# Altium PCB bookmarker.PcbDoc (part 3 of 3)
Units mil, origin at the board's own origin, x right, y up, seen from the top; angles counter-clockwise.
Board outline 5902.76 x 1187.28 mil, 2 copper layers (Top Layer, Bottom Layer); 9 components, 4 nets, 34 pads, 30 vias.
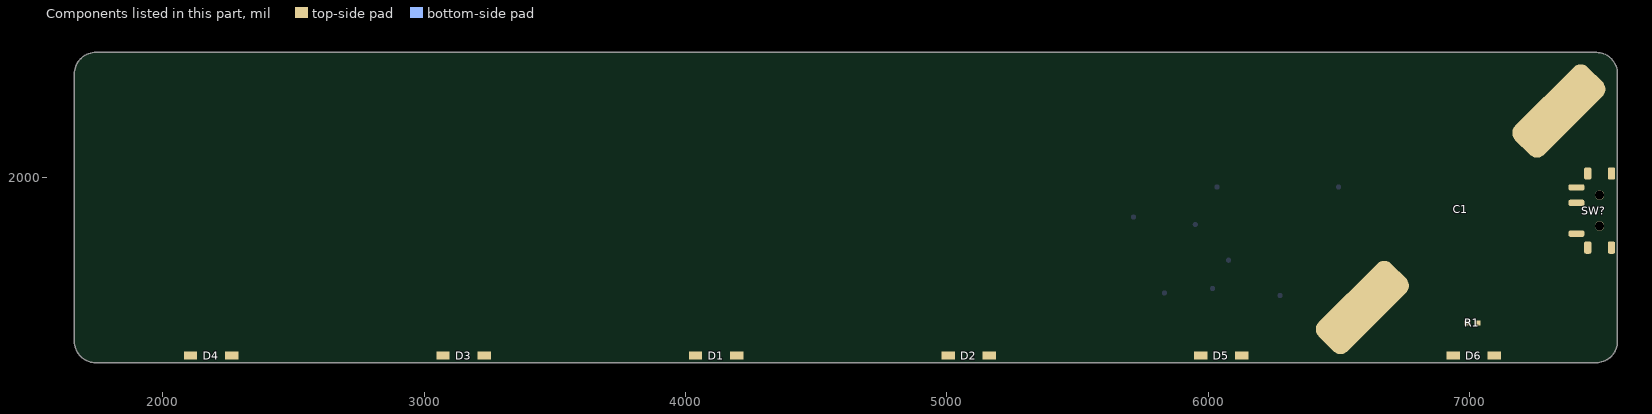
[diagram p3: the components of this part, seen from the top]

## Via types
v1: diameter 24, hole 12, Top Layer to Bottom Layer, tented both sides, 29 vias
v2: diameter 100, hole 80, Top Layer to Bottom Layer, tented both sides, 1 vias

## Nets (pads, with @x,y where several pads share a name; then routed paths per layer and width w, separated by ;. In a path a pad name is that pad's centre, name@x,y a point inside that pad or via, vN(x,y) a via of type N, cw(c..) or ccw(c..) an arc to the next point about the centre after c; other vN are vias at no path point) (continued)
copper on no net: (continued)
  Bottom Layer w5: 4335,1486.5 4348.5,1486.5 ; 4335,2071.5 4357.5,2071.5 ; 4335,2076 4353,2076 ; 4339.5,2062.5 4362,2062.5 ; 4339.5,2067 4362,2067 ; 4344,2058 4366.5,2058 ; 4344,2130 4623,2130 ; 4348.5,2049 4371,2049 ; 4348.5,2053.5 4366.5,2053.5 ; 4353,2044.5 4375.5,2044.5 ; 4357.5,2035.5 4380,2035.5 ; 4357.5,2040 4375.5,2040 ; 4362,2031 4380,2031 ; 4366.5,2022 4384.5,2022 ; 4366.5,2026.5 4384.5,2026.5 ; 4371,2017.5 4384.5,2017.5 ; 4384.5,2283 4407,2283 ; 4384.5,2287.5 4402.5,2287.5 ; 4384.5,2292 4402.5,2292 ; 4384.5,2296.5 4398,2296.5 ; 4389,2274 4411.5,2274 ; 4389,2278.5 4407,2278.5 ; 4393.5,2269.5 4416,2269.5 ; 4398,2260.5 4420.5,2260.5 ; 4398,2265 4416,2265 ; 4402.5,2251.5 4425,2251.5 ; 4402.5,2256 4425,2256 ; 4407,2247 4429.5,2247 ; 4411.5,2238 4434,2238 ; 4411.5,2242.5 4429.5,2242.5 ; 4416,2229 4438.5,2229 ; 4416,2233.5 4438.5,2233.5 ; 4420.5,2224.5 4443,2224.5 ; 4425,2215.5 4447.5,2215.5 ; 4425,2220 4443,2220 ; 4429.5,2211 4452,2211 ; 4434,2202 4456.5,2202 ; 4434,2206.5 4452,2206.5 ; 4438.5,2193 4461,2193 ; 4438.5,2197.5 4461,2197.5 ; 4443,2188.5 4465.5,2188.5 ; 4447.5,2179.5 4470,2179.5 ; 4447.5,2184 4465.5,2184 ; 4452,2170.5 4474.5,2170.5 ; 4452,2175 4474.5,2175 ; 4456.5,2166 4479,2166 ; 4461,2157 4483.5,2157 ; 4461,2161.5 4479,2161.5 ; 4465.5,2148 4488,2148 ; 4465.5,2152.5 4488,2152.5 ; 4470,2143.5 4492.5,2143.5 ; 4474.5,2134.5 4497,2134.5 ; 4474.5,2139 4492.5,2139 ; 4488,2112 4510.5,2112 ; 4492.5,2107.5 4515,2107.5 ; 4497,2098.5 4519.5,2098.5 ; 4497,2103 4515,2103 ; 4501.5,2089.5 4524,2089.5 ; 4501.5,2094 4524,2094 ; 4506,2085 4528.5,2085 ; 4510.5,2076 4533,2076 ; 4510.5,2080.5 4528.5,2080.5 ; 4515,2071.5 4537.5,2071.5 ; 4519.5,2062.5 4542,2062.5 ; 4519.5,2067 4537.5,2067 ; 4524,2053.5 4546.5,2053.5 ; 4524,2058 4546.5,2058 ; 4528.5,2049 4551,2049 ; 4533,2040 4555.5,2040 ; 4533,2044.5 4551,2044.5 ; 4533,2247 4555.5,2247 ; 4533,2251.5 4551,2251.5 ; 4537.5,2031 4560,2031 ; 4537.5,2035.5 4560,2035.5 ; 4537.5,2238 4560,2238 ; 4537.5,2242.5 4555.5,2242.5 ; 4542,2026.5 4564.5,2026.5 ; 4542,2229 4564.5,2229 ; 4542,2233.5 4560,2233.5 ; 4546.5,2017.5 4569,2017.5 ; 4546.5,2022 4564.5,2022 ; 4546.5,2220 4569,2220 ; 4546.5,2224.5 4569,2224.5 ; 4551,2008.5 4573.5,2008.5 ; 4551,2013 4573.5,2013 ; 4551,2215.5 4573.5,2215.5 ; 4551,2265 4654.5,2265 ; 4551,2269.5 4650,2269.5 ; 4551,2274 4650,2274 ; 4555.5,2004 4578,2004 ; 4555.5,2206.5 4578,2206.5 ; 4555.5,2211 4573.5,2211 ; 4555.5,2260.5 4654.5,2260.5 ; 4560,1995 4582.5,1995 ; 4560,1999.5 4578,1999.5 ; 4560,2197.5 4582.5,2197.5 ; 4560,2202 4582.5,2202 ; 4564.5,1990.5 4587,1990.5 ; 4564.5,2193 4587,2193 ; 4569,1981.5 4591.5,1981.5 ; 4569,1986 4587,1986 ; 4569,2184 4591.5,2184 ; 4569,2188.5 4587,2188.5 ; 4573.5,1972.5 4596,1972.5 ; 4573.5,1977 4596,1977 ; 4573.5,2179.5 4596,2179.5 ; 4578,1968 4600.5,1968 ; 4578,2170.5 4600.5,2170.5 ; 4578,2175 4596,2175 ; 4582.5,1959 4605,1959 ; 4582.5,1963.5 4600.5,1963.5 ; 4582.5,2161.5 4605,2161.5 ; 4582.5,2166 4605,2166 ; 4587,1950 4609.5,1950 ; 4587,1954.5 4609.5,1954.5 ; 4587,2157 4609.5,2157 ; 4591.5,1945.5 4614,1945.5 ; 4591.5,2148 4614,2148 ; 4591.5,2152.5 4609.5,2152.5 ; 4596,1936.5 4614,1936.5 ; 4596,1941 4614,1941 ; 4596,2139 4618.5,2139 ; 4596,2143.5 4618.5,2143.5 ; 4600.5,1932 4614,1932 ; 4600.5,2134.5 4623,2134.5 ; 4614,2112 4636.5,2112 ; 4618.5,2103 4641,2103 ; 4618.5,2107.5 4641,2107.5 ; 4623,2098.5 4645.5,2098.5 ; 4627.5,2089.5 4650,2089.5 ; 4627.5,2094 4645.5,2094 ; 4632,2080.5 4654.5,2080.5 ; 4632,2085 4654.5,2085 ; 4636.5,2076 4659,2076 ; 4636.5,2251.5 4663.5,2251.5 ; 4636.5,2256 4659,2256 ; 4641,2067 4663.5,2067 ; 4641,2071.5 4659,2071.5 ; 4641,2247 4663.5,2247 ; 4645.5,2058 4668,2058 ; 4645.5,2062.5 4668,2062.5 ; 4645.5,2238 4668,2238 ; 4645.5,2242.5 4668,2242.5 ; 4650,2053.5 4672.5,2053.5 ; 4650,2229 4677,2229 ; 4650,2233.5 4672.5,2233.5 ; 4654.5,2044.5 4677,2044.5 ; 4654.5,2049 4672.5,2049 ; 4654.5,2224.5 4677,2224.5 ; 4659,2040 4681.5,2040 ; 4659,2215.5 4686,2215.5 ; 4659,2220 4681.5,2220 ; 4663.5,2031 4686,2031 ; 4663.5,2035.5 4681.5,2035.5 ; 4663.5,2211 4686,2211 ; 4668,2022 4690.5,2022 ; 4668,2026.5 4690.5,2026.5 ; 4668,2202 4690.5,2202 ; 4668,2206.5 4690.5,2206.5 ; 4672.5,2017.5 4695,2017.5 ; 4672.5,2193 4699.5,2193 ; 4672.5,2197.5 4695,2197.5 ; 4677,2008.5 4699.5,2008.5 ; 4677,2013 4695,2013 ; 4677,2188.5 4699.5,2188.5 ; 4681.5,1999.5 4704,1999.5 ; 4681.5,2004 4704,2004 ; 4681.5,2179.5 4704,2179.5 ; 4681.5,2184 4704,2184 ; 4686,1995 4708.5,1995 ; 4686,2170.5 4713,2170.5 ; 4686,2175 4708.5,2175 ; 4690.5,1986 4713,1986 ; 4690.5,1990.5 4708.5,1990.5 ; 4690.5,2166 4713,2166 ; 4695,1981.5 4713,1981.5 ; 4695,2157 4722,2157 ; 4695,2161.5 4717.5,2161.5 ; 4699.5,1977 4713,1977 ; 4699.5,2148 4726.5,2148 ; 4699.5,2152.5 4722,2152.5 ; 4704,2143.5 4726.5,2143.5 ; 4708.5,2134.5 4735.5,2134.5 ; 4708.5,2139 4731,2139 ; 4713,2130 4740,2130 ; 4717.5,2121 4785,2121 ; 4717.5,2125.5 4762.5,2125.5 ; 4722,2112 4821,2112 ; 4722,2116.5 4807.5,2116.5 ; 4726.5,2107.5 4825.5,2107.5 ; 4731,2098.5 4753.5,2098.5 ; 4731,2103 4753.5,2103 ; 4735.5,1950 4843.5,1950 ; 4735.5,1954.5 4843.5,1954.5 ; 4735.5,1959 4839,1959 ; 4735.5,1963.5 4839,1963.5 ; 4735.5,2089.5 4762.5,2089.5 ; 4735.5,2094 4758,2094 ; 4740,1945.5 4839,1945.5 ; 4740,2085 4762.5,2085 ; 4744.5,2076 4771.5,2076 ; 4744.5,2080.5 4767,2080.5 ; 4749,2071.5 4771.5,2071.5 ; 4753.5,2062.5 4776,2062.5 ; 4753.5,2067 4776,2067 ; 4758,2053.5 4785,2053.5 ; 4758,2058 4780.5,2058 ; 4762.5,2049 4785,2049 ; 4767,2040 4789.5,2040 ; 4767,2044.5 4789.5,2044.5 ; 4771.5,2031 4798.5,2031 ; 4771.5,2035.5 4794,2035.5 ; 4776,2026.5 4798.5,2026.5 ; 4776,2103 4825.5,2103 ; 4780.5,2017.5 4807.5,2017.5 ; 4780.5,2022 4803,2022 ; 4785,2008.5 4812,2008.5 ; 4785,2013 4807.5,2013 ; 4789.5,2004 4812,2004 ; 4794,1995 4821,1995 ; 4794,1999.5 4816.5,1999.5 ; 4798.5,1990.5 4821,1990.5 ; 4798.5,2098.5 4825.5,2098.5 ; 4803,1981.5 4825.5,1981.5 ; 4803,1986 4825.5,1986 ; 4807.5,1972.5 4834.5,1972.5 ; 4807.5,1977 4830,1977 ; 4812,1968 4834.5,1968
  Bottom Layer w6: 5535.95,1962.65 5545.05,1962.65 ; 5535.95,1967.2 5540.5,1967.2 ; 5535.95,1971.75 5540.5,1971.75 ; 5535.95,1976.3 5540.5,1976.3 ; 5535.95,1980.85 5540.5,1980.85 ; 5535.95,1985.4 5540.5,1985.4 ; 5535.95,1989.95 5545.05,1989.95 ; 5540.5,1953.55 5545.05,1953.55 ; 5540.5,1958.1 5545.05,1958.1 ; 5540.5,1994.5 5549.6,1994.5 ; 5545.05,1944.45 5554.15,1944.45 ; 5545.05,1949 5549.6,1949 ; 5545.05,1999.05 5558.7,1999.05 ; 5545.05,2003.6 5581.45,2003.6 ; 5549.6,1935.35 5558.7,1935.35 ; 5549.6,1939.9 5554.15,1939.9 ; 5549.6,2008.15 5558.7,2008.15 ; 5554.15,1926.25 5563.25,1926.25 ; 5554.15,1930.8 5558.7,1930.8 ; 5554.15,2012.7 5558.7,2012.7 6518.75,2012.7 6532.4,2012.7 ; 5554.15,2017.25 5563.25,2017.25 ; 5558.7,1921.7 5567.8,1921.7 ; 5558.7,2021.8 5563.25,2021.8 ; 5558.7,2026.35 5567.8,2026.35 ; 5563.25,1912.6 5572.35,1912.6 ; 5563.25,1917.15 5567.8,1917.15 ; 5563.25,2030.9 5567.8,2030.9 ; 5567.8,1903.5 5576.9,1903.5 ; 5567.8,1908.05 5572.35,1908.05 ; 5567.8,2008.15 6532.4,2008.15 ; 5567.8,2035.45 5572.35,2035.45 ; 5567.8,2040 5576.9,2040 ; 5572.35,1894.4 5581.45,1894.4 ; 5572.35,1898.95 5576.9,1898.95 ; 5572.35,2044.55 5576.9,2044.55 ; 5572.35,2049.1 5581.45,2049.1 ; 5576.9,1889.85 5581.45,1889.85 ; 5576.9,2053.65 5581.45,2053.65 ; 5576.9,2058.2 5586,2058.2 ; 5581.45,1880.75 5590.55,1880.75 ; 5581.45,1885.3 5586,1885.3 ; 5581.45,2062.75 5586,2062.75 ; 5586,1871.65 5595.1,1871.65 ; 5586,1876.2 5590.55,1876.2 ; 5586,2067.3 5590.55,2067.3 ; 5586,2071.85 5590.55,2071.85 ; 5590.55,1862.55 5599.65,1862.55 ; 5590.55,1867.1 5595.1,1867.1 ; 5590.55,2076.4 5595.1,2076.4 ; 5590.55,2080.95 5599.65,2080.95 ; 5595.1,1858 5599.65,1858 ; 5595.1,2085.5 5599.65,2085.5 ; 5595.1,2090.05 5604.2,2090.05 ; 5599.65,1848.9 5608.75,1848.9 ; 5599.65,1853.45 5604.2,1853.45 ; 5599.65,2094.6 5604.2,2094.6 ; 5599.65,2099.15 5608.75,2099.15 ; 5604.2,1844.35 5608.75,1844.35 ; 5604.2,2103.7 5608.75,2103.7 ; 5604.2,2108.25 5613.3,2108.25 ; 5608.75,1835.25 5617.85,1835.25 ; 5608.75,1839.8 5613.3,1839.8 ; 5608.75,2112.8 5613.3,2112.8 ; 5608.75,2117.35 5617.85,2117.35 ; 5613.3,1830.7 5622.4,1830.7 ; 5613.3,2121.9 5622.4,2121.9 ; 5617.85,1826.15 5626.95,1826.15 ; 5617.85,2126.45 5622.4,2126.45 ; 5617.85,2131 5626.95,2131 ; 5622.4,1821.6 5626.95,1821.6 ; 5622.4,2135.55 5626.95,2135.55 ; 5622.4,2140.1 5631.5,2140.1 ; 5626.95,1817.05 5636.05,1817.05 ; 5626.95,2144.65 5631.5,2144.65 ; 5626.95,2149.2 5636.05,2149.2 ; 5631.5,1812.5 5640.6,1812.5 ; 5631.5,2153.75 5636.05,2153.75 ; 5636.05,1807.95 5645.15,1807.95 ; 5636.05,2158.3 5640.6,2158.3 ; 5636.05,2162.85 5640.6,2162.85 ; 5640.6,1803.4 5654.25,1803.4 ; 5640.6,2167.4 5645.15,2167.4 ; 5640.6,2171.95 5649.7,2171.95 ; 5645.15,2176.5 5649.7,2176.5 ; 5645.15,2181.05 5654.25,2181.05 ; 5649.7,1798.85 5663.35,1798.85 ; 5649.7,2185.6 5654.25,2185.6 ; 5649.7,2190.15 5658.8,2190.15 ; 5654.25,2194.7 5658.8,2194.7 ; 5658.8,1794.3 5677,1794.3 ; 5658.8,2199.25 5663.35,2199.25 ; 5658.8,2203.8 5667.9,2203.8 ; 5663.35,2208.35 5667.9,2208.35 ; 5663.35,2212.9 5672.45,2212.9 ; 5667.9,2217.45 5677,2217.45 ; 5672.45,1789.75 5699.75,1789.75 ; 5672.45,2222 5677,2222 ; 5677,2226.55 5681.55,2226.55 ; 5677,2231.1 5686.1,2231.1 ; 5681.55,2235.65 5690.65,2235.65 ; 5686.1,2240.2 5695.2,2240.2 ; 5690.65,1785.2 6091.05,1785.2 ; 5690.65,2244.75 5695.2,2244.75 ; 5695.2,1694.2 5704.3,1694.2 ; 5695.2,1698.75 5699.75,1698.75 ; 5695.2,1703.3 5699.75,1703.3 ; 5695.2,1707.85 5699.75,1707.85 ; 5695.2,1712.4 5699.75,1712.4 ; 5695.2,1716.95 5704.3,1716.95 ; 5695.2,2249.3 5704.3,2249.3 ; 5699.75,1680.55 5708.85,1680.55 ; 5699.75,1685.1 5704.3,1685.1 ; 5699.75,1689.65 5704.3,1689.65 ; 5699.75,1721.5 5708.85,1721.5 ; 5699.75,1726.05 5717.95,1726.05 ; 5699.75,2253.85 5708.85,2253.85 ; 5704.3,1671.45 5713.4,1671.45 ; 5704.3,1676 5708.85,1676 ; 5704.3,1730.6 6122.9,1730.6 ; 5704.3,2258.4 5717.95,2258.4 ; 5708.85,1662.35 5717.95,1662.35 ; 5708.85,1666.9 5713.4,1666.9 ; 5708.85,1735.15 6122.9,1735.15 ; 5708.85,1739.7 5717.95,1739.7 ; 5713.4,1653.25 5722.5,1653.25 ; 5713.4,1657.8 5717.95,1657.8 ; 5713.4,1744.25 5717.95,1744.25 ; 5713.4,1748.8 5722.5,1748.8 ; 5713.4,2262.95 5731.6,2262.95 ; 5717.95,1644.15 5727.05,1644.15 ; 5717.95,1648.7 5722.5,1648.7 ; 5717.95,1753.35 5727.05,1753.35 ; 5722.5,1639.6 5727.05,1639.6 ; 5722.5,1757.9 5727.05,1757.9 ; 5722.5,1762.45 5731.6,1762.45 ; 5727.05,1630.5 5736.15,1630.5 ; 5727.05,1635.05 5731.6,1635.05 ; 5727.05,1767 5731.6,1767 ; 5727.05,1771.55 5736.15,1771.55 ; 5727.05,1780.65 6095.6,1780.65 ; 5727.05,2267.5 5909.05,2267.5 ; 5731.6,1621.4 5740.7,1621.4 ; 5731.6,1625.95 5736.15,1625.95 ; 5731.6,1776.1 5736.15,1776.1 ; 5736.15,1612.3 5745.25,1612.3 ; 5736.15,1616.85 5740.7,1616.85 ; 5740.7,1603.2 5749.8,1603.2 ; 5740.7,1607.75 5745.25,1607.75 ; 5745.25,1598.65 5749.8,1598.65 ; 5749.8,1589.55 5758.9,1589.55 ; 5749.8,1594.1 5754.35,1594.1 ; 5754.35,1580.45 5763.45,1580.45 ; 5754.35,1585 5758.9,1585 ; 5758.9,1575.9 5763.45,1575.9 ; 5763.45,1566.8 5772.55,1566.8 ; 5763.45,1571.35 5768,1571.35 ; 5768,1557.7 5777.1,1557.7 ; 5768,1562.25 5772.55,1562.25 ; 5772.55,1553.15 5781.65,1553.15 ; 5777.1,1548.6 5786.2,1548.6 ; 5781.65,1544.05 5790.75,1544.05 ; 5786.2,1539.5 5795.3,1539.5 ; 5790.75,1534.95 5799.85,1534.95 ; 5795.3,1530.4 5808.95,1530.4 ; 5804.4,1525.85 5818.05,1525.85 ; 5813.5,1521.3 5836.25,1521.3 ; 5831.7,1516.75 6191.15,1516.75 6773.25,1516.75 6814.5,1516.75 ; 5840.8,2126.45 5849.9,2126.45 ; 5840.8,2131 5849.9,2131 ; 5840.8,2135.55 5845.35,2135.55 ; 5840.8,2140.1 5845.35,2140.1 ; 5840.8,2144.65 5845.35,2144.65 ; 5840.8,2149.2 5845.35,2149.2 ; 5840.8,2153.75 5849.9,2153.75 ; 5840.8,2158.3 5849.9,2158.3 ; 5845.35,2112.8 5854.45,2112.8 ; 5845.35,2117.35 5849.9,2117.35 ; 5845.35,2121.9 5849.9,2121.9 ; 5845.35,2162.85 5849.9,2162.85 ; 5845.35,2167.4 5849.9,2167.4 ; 5845.35,2171.95 5854.45,2171.95 ; 5849.9,2099.15 5859,2099.15 ; 5849.9,2103.7 5854.45,2103.7 ; 5849.9,2108.25 5854.45,2108.25 ; 5849.9,2176.5 5854.45,2176.5 ; 5849.9,2181.05 5859,2181.05 ; 5854.45,1512.2 6809.95,1512.2 6819.05,1512.2 ; 5854.45,2090.05 5863.55,2090.05 ; 5854.45,2094.6 5859,2094.6 ; 5854.45,2185.6 5863.55,2185.6 ; 5859,2080.95 5868.1,2080.95 ; 5859,2085.5 5863.55,2085.5 ; 5859,2190.15 5868.1,2190.15 ; 5859,2194.7 5877.2,2194.7 ; 5863.55,2071.85 5872.65,2071.85 ; 5863.55,2076.4 5868.1,2076.4 ; 5863.55,2199.25 5881.75,2199.25 ; 5863.55,2203.8 5872.65,2203.8 ; 5868.1,2067.3 5872.65,2067.3 ; 5868.1,2208.35 5872.65,2208.35 ; 5872.65,2058.2 5881.75,2058.2 ; 5872.65,2062.75 5877.2,2062.75 ; 5872.65,2212.9 5877.2,2212.9 ; 5872.65,2217.45 5881.75,2217.45 ; 5877.2,2049.1 5886.3,2049.1 ; 5877.2,2053.65 5881.75,2053.65 ; 5877.2,2203.8 5895.4,2203.8 ; 5877.2,2222 5881.75,2222 ; 5877.2,2226.55 5886.3,2226.55 ; 5881.75,2044.55 5886.3,2044.55 ; 5881.75,2231.1 5886.3,2231.1 ; 5881.75,2235.65 5890.85,2235.65 ; 5886.3,2035.45 5895.4,2035.45 ; 5886.3,2040 5890.85,2040 ; 5886.3,2208.35 5909.05,2208.35 ; 5886.3,2240.2 5890.85,2240.2 ; 5886.3,2244.75 5895.4,2244.75 ; 5890.85,2026.35 5899.95,2026.35 ; 5890.85,2030.9 5895.4,2030.9 ; 5890.85,2249.3 5895.4,2249.3 ; 5895.4,2017.25 5904.5,2017.25 ; 5895.4,2021.8 5899.95,2021.8 ; 5895.4,2253.85 5899.95,2253.85 ; 5895.4,2258.4 5904.5,2258.4 ; 5895.4,2262.95 5904.5,2262.95 ; 5899.95,2012.7 5909.05,2012.7 ; 5899.95,2212.9 5963.65,2212.9 ; 5904.5,2272.05 5909.05,2272.05 ; 5904.5,2276.6 5913.6,2276.6 ; 5909.05,2281.15 5913.6,2281.15 ; 5913.6,2285.7 5918.15,2285.7 ; 5913.6,2290.25 5922.7,2290.25 ; 5918.15,2294.8 5922.7,2294.8 ; 5918.15,2299.35 5927.25,2299.35 ; 5920,2217.45 6204.8,2217.45 ; 5922.7,2303.9 5927.25,2303.9 ; 5922.7,2308.45 5931.8,2308.45 ; 5927.25,2313 5931.8,2313 ; 5927.25,2317.55 5936.35,2317.55 ; 5931.8,2322.1 5936.35,2322.1 ; 5931.8,2326.65 5940.9,2326.65 ; 5936.35,2331.2 5940.9,2331.2 ; 5940.9,2335.75 5945.45,2335.75 ; 5940.9,2340.3 5950,2340.3 ; 5945.45,2344.85 5950,2344.85 ; 5945.45,2349.4 5954.55,2349.4 ; 5950,2353.95 5954.55,2353.95 ; 5950,2358.5 5959.1,2358.5 ; 5954.55,2363.05 5959.1,2363.05 ; 5954.55,2367.6 5963.65,2367.6 ; 5955,2212.9 6223,2212.9 ; 5959.1,2003.6 5968.2,2003.6 ; 5959.1,2372.15 5968.2,2372.15 ; 5963.65,1994.5 5972.75,1994.5 ; 5963.65,1999.05 5968.2,1999.05 ; 5963.65,2376.7 5968.2,2376.7 ; 5963.65,2381.25 5972.75,2381.25 ; 5968.2,1985.4 5977.3,1985.4 ; 5968.2,1989.95 5972.75,1989.95 ; 5968.2,2385.8 5972.75,2385.8 ; 5968.2,2390.35 5977.3,2390.35 ; 5972.75,1980.85 5981.85,1980.85 ; 5972.75,2394.9 5981.85,2394.9 ; 5977.3,1971.75 5986.4,1971.75 ; 5977.3,1976.3 5981.85,1976.3 ; 5977.3,2399.45 5981.85,2399.45 ; 5977.3,2404 5986.4,2404 ; 5981.85,1962.65 5990.95,1962.65 ; 5981.85,1967.2 5986.4,1967.2 ; 5981.85,2408.55 5986.4,2408.55 ; 5986.4,1953.55 5995.5,1953.55 ; 5986.4,1958.1 5990.95,1958.1 ; 5986.4,2413.1 5990.95,2413.1 ; 5986.4,2417.65 5995.5,2417.65 ; 5990.95,1949 6000.05,1949 ; 5990.95,2422.2 6000.05,2422.2 ; 5995.5,1939.9 6004.6,1939.9 ; 5995.5,1944.45 6000.05,1944.45 ; 5995.5,2426.75 6000.05,2426.75 ; 5995.5,2431.3 6004.6,2431.3 ; 6000.05,1930.8 6009.15,1930.8 ; 6000.05,1935.35 6004.6,1935.35 ; 6000.05,2435.85 6009.15,2435.85 ; 6004.6,1921.7 6013.7,1921.7 ; 6004.6,1926.25 6009.15,1926.25 ; 6004.6,2440.4 6013.7,2440.4 ; 6009.15,1917.15 6018.25,1917.15 ; 6009.15,2444.95 6018.25,2444.95 ; 6013.7,1908.05 6022.8,1908.05 ; 6013.7,1912.6 6018.25,1912.6 ; 6013.7,2449.5 6022.8,2449.5 ; 6018.25,1898.95 6027.35,1898.95 ; 6018.25,1903.5 6022.8,1903.5 ; 6022.8,1894.4 6031.9,1894.4 ; 6022.8,2454.05 6031.9,2454.05 ; 6027.35,1885.3 6036.45,1885.3 ; 6027.35,1889.85 6031.9,1889.85 ; 6027.35,2458.6 6036.45,2458.6 6041,2463.15 6050.1,2463.15 6391.35,2463.15 6414.1,2463.15 ; 6031.9,1876.2 6041,1876.2 ; 6031.9,1880.75 6036.45,1880.75 ; 6036.45,1867.1 6045.55,1867.1 ; 6036.45,1871.65 6041,1871.65 ; 6041,1862.55 6045.55,1862.55 ; 6045.55,1853.45 6054.65,1853.45 ; 6045.55,1858 6050.1,1858 ; 6050.1,1844.35 6059.2,1844.35 ; 6050.1,1848.9 6054.65,1848.9 ; 6052.95,2467.25 6093.9,2467.25 ; 6054.65,1835.25 6063.75,1835.25 ; 6054.65,1839.8 6059.2,1839.8 ; 6059.2,1830.7 6063.75,1830.7 ; 6063.75,1821.6 6072.85,1821.6 ; 6063.75,1826.15 6068.3,1826.15 ; 6068.3,1812.5 6077.4,1812.5 ; 6068.3,1817.05 6072.85,1817.05 ; 6072.85,1807.95 6077.4,1807.95 ; 6077.4,1798.85 6086.5,1798.85 ; 6077.4,1803.4 6081.95,1803.4 ; 6081.4,2466.8 6245.2,2466.8 ; 6081.95,1789.75 6091.05,1789.75 ; 6081.95,1794.3 6086.5,1794.3 ; 6091.05,1771.55 6100.15,1771.55 ; 6091.05,1776.1 6095.6,1776.1 ; 6095.6,1767 6104.7,1767 ; 6100.15,1757.9 6109.25,1757.9 ; 6100.15,1762.45 6104.7,1762.45 ; 6104.7,1748.8 6113.8,1748.8 ; 6104.7,1753.35 6109.25,1753.35 ; 6109.25,1739.7 6118.35,1739.7 ; 6109.25,1744.25 6113.8,1744.25 ; 6118.35,1726.05 6127.45,1726.05 ; 6122.9,1716.95 6132,1716.95 ; 6122.9,1721.5 6127.45,1721.5 ; 6127.45,1712.4 6136.55,1712.4 ; 6132,1703.3 6141.1,1703.3 ; 6132,1707.85 6136.55,1707.85 ; 6136.55,1694.2 6145.65,1694.2 ; 6136.55,1698.75 6141.1,1698.75 ; 6141.1,1685.1 6150.2,1685.1 ; 6141.1,1689.65 6145.65,1689.65 ; 6145.65,1680.55 6150.2,1680.55 ; 6150.2,1671.45 6159.3,1671.45 ; 6150.2,1676 6154.75,1676 ; 6154.75,1662.35 6163.85,1662.35 ; 6154.75,1666.9 6159.3,1666.9 ; 6159.3,1653.25 6168.4,1653.25 ; 6159.3,1657.8 6163.85,1657.8 ; 6163.85,1648.7 6172.95,1648.7 ; 6168.4,1639.6 6177.5,1639.6 ; 6168.4,1644.15 6172.95,1644.15 ; 6172.95,1630.5 6182.05,1630.5 ; 6172.95,1635.05 6177.5,1635.05 ; 6177.5,1625.95 6186.6,1625.95 ; 6182.05,1616.85 6191.15,1616.85 ; 6182.05,1621.4 6186.6,1621.4 ; 6186.6,1607.75 6195.7,1607.75 ; 6186.6,1612.3 6191.15,1612.3 ; 6191.15,1507.65 6200.25,1507.65 ; 6191.15,1598.65 6200.25,1598.65 ; 6191.15,1603.2 6195.7,1603.2 ; 6192.85,2467.25 6374.85,2467.25 ; 6195.7,1498.55 6204.8,1498.55 ; 6195.7,1503.1 6200.25,1503.1 ; 6195.7,1594.1 6200.25,1594.1 ; 6200.25,1489.45 6209.35,1489.45 ; 6200.25,1494 6204.8,1494 ; 6200.25,1585 6209.35,1585 ; 6200.25,1589.55 6204.8,1589.55 ; 6204.8,1480.35 6213.9,1480.35 ; 6204.8,1484.9 6209.35,1484.9 ; 6204.8,1575.9 6213.9,1575.9 ; 6204.8,1580.45 6209.35,1580.45 ; 6209.35,1475.8 6213.9,1475.8 ; 6209.35,1566.8 6218.45,1566.8 ; 6209.35,1571.35 6213.9,1571.35 ; 6213.9,1466.7 6223,1466.7 ; 6213.9,1471.25 6218.45,1471.25 ; 6213.9,1562.25 6223,1562.25 ; 6218.45,1462.15 6223,1462.15 ; 6218.45,1553.15 6227.55,1553.15 ; 6218.45,1557.7 6223,1557.7 ; 6218.45,2208.35 6245.75,2208.35 ; 6223,1453.05 6232.1,1453.05 ; 6223,1457.6 6227.55,1457.6 ; 6223,1544.05 6232.1,1544.05 ; 6223,1548.6 6227.55,1548.6 ; 6227.55,1443.95 6236.65,1443.95 ; 6227.55,1448.5 6232.1,1448.5 ; 6227.55,1539.5 6236.65,1539.5 ; 6232.1,1439.4 6241.2,1439.4 ; 6232.1,1530.4 6241.2,1530.4 ; 6232.1,1534.95 6236.65,1534.95 ; 6232.1,1844.35 6241.2,1844.35 6236.65,1848.9 6232.1,1848.9 ; 6232.1,1853.45 6236.65,1853.45 ; 6232.1,1858 6241.2,1858 ; 6236.65,1430.3 6245.75,1430.3 ; 6236.65,1434.85 6241.2,1434.85 ; 6236.65,1521.3 6245.75,1521.3 ; 6236.65,1525.85 6241.2,1525.85 ; 6236.65,1830.7 6245.75,1830.7 6241.2,1835.25 6236.65,1835.25 ; 6236.65,1839.8 6241.2,1839.8 ; 6236.65,1862.55 6241.2,1862.55 ; 6236.65,1867.1 6245.75,1867.1 ; 6241.2,1425.75 6250.3,1425.75 ; 6241.2,1821.6 6250.3,1821.6 ; 6241.2,1826.15 6245.75,1826.15 ; 6241.2,1871.65 6441.4,1871.65 6459.6,1871.65 ; 6241.2,2203.8 6263.95,2203.8 ; 6245.75,1421.2 6254.85,1421.2 ; 6245.75,1812.5 6254.85,1812.5 ; 6245.75,1817.05 6250.3,1817.05 ; 6250.3,1412.1 6259.4,1412.1 ; 6250.3,1416.65 6254.85,1416.65 ; 6250.3,1803.4 6259.4,1803.4 ; 6250.3,1807.95 6254.85,1807.95 ; 6254.85,1407.55 6263.95,1407.55 ; 6254.85,1794.3 6263.95,1794.3 ; 6254.85,1798.85 6259.4,1798.85 ; 6254.85,1876.2 6445.95,1876.2 ; 6259.4,1403 6268.5,1403 ; 6259.4,1785.2 6268.5,1785.2 ; 6259.4,1789.75 6263.95,1789.75 ; 6259.4,2199.25 6277.6,2199.25 ; 6263.95,1398.45 6273.05,1398.45 ; 6263.95,1780.65 6273.05,1780.65 ; 6268.5,1393.9 6277.6,1393.9 ; 6268.5,1771.55 6277.6,1771.55 ; 6268.5,1776.1 6273.05,1776.1 ; 6273.05,1389.35 6282.15,1389.35 ; 6273.05,1762.45 6282.15,1762.45 ; 6273.05,1767 6277.6,1767 ; 6273.05,2194.7 6291.25,2194.7 ; 6277.6,1384.8 6286.7,1384.8 ; 6277.6,1757.9 6286.7,1757.9 ; 6282.15,1380.25 6291.25,1380.25 ; 6282.15,1748.8 6291.25,1748.8 ; 6282.15,1753.35 6286.7,1753.35 ; 6286.7,1375.7 6295.8,1375.7 ; 6286.7,1739.7 6295.8,1739.7 ; 6286.7,1744.25 6291.25,1744.25 ; 6286.7,2190.15 6304.9,2190.15 ; 6291.25,1371.15 6300.35,1371.15 ; 6291.25,1735.15 6295.8,1735.15 ; 6295.8,1366.6 6304.9,1366.6 ; 6295.8,1726.05 6304.9,1726.05 ; 6295.8,1730.6 6300.35,1730.6 ; 6300.35,1362.05 6309.45,1362.05 ; 6300.35,1716.95 6309.45,1716.95 ; 6300.35,1721.5 6304.9,1721.5 ; 6300.35,2185.6 6314,2185.6 ; 6304.9,1707.85 6314,1707.85 ; 6304.9,1712.4 6309.45,1712.4 ; 6309.45,1357.5 6318.55,1357.5 ; 6309.45,1703.3 6318.55,1703.3 ; 6309.45,2181.05 6327.65,2181.05 ; 6314,1352.95 6323.1,1352.95 ; 6314,1694.2 6323.1,1694.2 ; 6314,1698.75 6318.55,1698.75 ; 6318.55,1689.65 6323.1,1689.65 ; 6323.1,1680.55 6332.2,1680.55 ; 6323.1,1685.1 6327.65,1685.1 ; 6323.1,2176.5 6336.75,2176.5 ; 6327.65,1676 6336.75,1676 ; 6332.2,1671.45 6341.3,1671.45 ; 6332.2,2171.95 6345.85,2171.95 ; 6341.3,1666.9 6350.4,1666.9 ; 6341.3,2167.4 6354.95,2167.4 ; 6345.85,1662.35 6354.95,1662.35 ; 6350.4,2162.85 6364.05,2162.85 ; 6354.95,1657.8 6368.6,1657.8 ; 6359.5,2158.3 6373.15,2158.3 ; 6364.05,1653.25 6382.25,1653.25 ; 6364.05,2467.7 6395.9,2467.7 ; 6368.6,2153.75 6382.25,2153.75 ; 6373.15,1648.7 6577.9,1648.7 ; 6377.7,2149.2 6386.8,2149.2 ; 6382.25,2144.65 6395.9,2144.65 ; 6391.35,1644.15 6564.25,1644.15 ; 6391.35,2140.1 6400.45,2140.1 ; 6395.9,2135.55 6409.55,2135.55 ; 6405,2131 6414.1,2131 ; 6409.55,2126.45 6423.2,2126.45 ; 6409.55,2458.6 6432.3,2458.6 ; 6418.65,2121.9 6427.75,2121.9 ; 6423.2,2117.35 6432.3,2117.35 ; 6427.75,2112.8 6436.85,2112.8 ; 6427.75,2454.05 6445.95,2454.05 ; 6436.85,2108.25 6445.95,2108.25 ; 6441.4,2103.7 6450.5,2103.7 ; 6441.4,2449.5 6455.05,2449.5 ; 6445.95,2099.15 6455.05,2099.15 ; 6450.5,2094.6 6459.6,2094.6 ; 6450.5,2444.95 6468.7,2444.95 ; 6455.05,1867.1 6468.7,1867.1 ; 6455.05,2090.05 6464.15,2090.05 ; 6459.6,2085.5 6468.7,2085.5 ; 6464.15,1862.55 6477.8,1862.55 ; 6464.15,2080.95 6473.25,2080.95 ; 6464.15,2440.4 6477.8,2440.4 ; 6468.7,2076.4 6477.8,2076.4 ; 6473.25,1858 6482.35,1858 ; 6473.25,2071.85 6482.35,2071.85 ; 6473.25,2435.85 6486.9,2435.85 ; 6477.8,2067.3 6486.9,2067.3 ; 6482.35,1853.45 6491.45,1853.45 ; 6482.35,2062.75 6491.45,2062.75 ; 6482.35,2431.3 6496,2431.3 ; 6486.9,1848.9 6496,1848.9 ; 6486.9,2058.2 6496,2058.2 ; 6491.45,1844.35 6500.55,1844.35 ; 6491.45,2053.65 6500.55,2053.65 ; 6491.45,2426.75 6505.1,2426.75 ; 6496,1839.8 6500.55,1839.8 ; 6496,2049.1 6500.55,2049.1 ; 6500.55,1830.7 6509.65,1830.7 ; 6500.55,1835.25 6505.1,1835.25 ; 6500.55,2040 6509.65,2040 ; 6500.55,2044.55 6505.1,2044.55 ; 6500.55,2422.2 6514.2,2422.2 ; 6505.1,1826.15 6509.65,1826.15 ; 6505.1,2035.45 6514.2,2035.45 ; 6509.65,1817.05 6518.75,1817.05 ; 6509.65,1821.6 6514.2,1821.6 ; 6509.65,2026.35 6518.75,2026.35 ; 6509.65,2030.9 6514.2,2030.9 ; 6509.65,2417.65 6523.3,2417.65 ; 6514.2,1807.95 6523.3,1807.95 ; 6514.2,1812.5 6518.75,1812.5 ; 6514.2,2021.8 6523.3,2021.8 ; 6518.75,1803.4 6527.85,1803.4 ; 6518.75,2017.25 6536.95,2017.25 ; 6518.75,2413.1 6532.4,2413.1 ; 6523.3,1794.3 6532.4,1794.3 ; 6523.3,1798.85 6527.85,1798.85 ; 6527.85,1785.2 6536.95,1785.2 ; 6527.85,1789.75 6532.4,1789.75 ; 6527.85,1999.05 6536.95,1999.05 ; 6527.85,2003.6 6532.4,2003.6 ; 6527.85,2408.55 6536.95,2408.55 ; 6532.4,1780.65 6541.5,1780.65 ; 6532.4,1994.5 6536.95,1994.5 ; 6532.4,2021.8 6536.95,2021.8 ; 6532.4,2026.35 6541.5,2026.35 ; 6536.95,1771.55 6546.05,1771.55 ; 6536.95,1776.1 6541.5,1776.1 ; 6536.95,1985.4 6541.5,1985.4 ; 6536.95,1989.95 6541.5,1989.95 ; 6536.95,2030.9 6541.5,2030.9 ; 6536.95,2035.45 6546.05,2035.45 ; 6536.95,2404 6546.05,2404 ; 6541.5,1762.45 6550.6,1762.45 ; 6541.5,1767 6546.05,1767 ; 6541.5,1976.3 6550.6,1976.3 ; 6541.5,1980.85 6546.05,1980.85 ; 6541.5,2040 6550.6,2040 ; 6541.5,2399.45 6550.6,2399.45 ; 6546.05,1757.9 6550.6,1757.9 ; 6546.05,1967.2 6555.15,1967.2 ; 6546.05,1971.75 6550.6,1971.75 ; 6546.05,2044.55 6550.6,2044.55 ; 6546.05,2049.1 6555.15,2049.1 ; 6550.6,1748.8 6559.7,1748.8 ; 6550.6,1753.35 6555.15,1753.35 ; 6550.6,1958.1 6559.7,1958.1 ; 6550.6,1962.65 6555.15,1962.65 ; 6550.6,2053.65 6555.15,2053.65 ; 6550.6,2058.2 6559.7,2058.2 ; 6550.6,2394.9 6559.7,2394.9 ; 6555.15,1739.7 6564.25,1739.7 ; 6555.15,1744.25 6559.7,1744.25 ; 6555.15,1953.55 6559.7,1953.55 ; 6555.15,2062.75 6559.7,2062.75 ; 6555.15,2067.3 6564.25,2067.3 ; 6555.15,2390.35 6564.25,2390.35 ; 6559.7,1730.6 6568.8,1730.6 ; 6559.7,1735.15 6564.25,1735.15 ; 6559.7,1944.45 6568.8,1944.45 ; 6559.7,1949 6564.25,1949 ; 6559.7,2071.85 6568.8,2071.85 ; 6559.7,2385.8 6573.35,2385.8 ; 6564.25,1726.05 6573.35,1726.05 ; 6564.25,1935.35 6573.35,1935.35 ; 6564.25,1939.9 6568.8,1939.9 ; 6564.25,2076.4 6568.8,2076.4 ; 6564.25,2080.95 6573.35,2080.95 ; 6568.8,1716.95 6577.9,1716.95 ; 6568.8,1721.5 6573.35,1721.5 ; 6568.8,1926.25 6577.9,1926.25 ; 6568.8,1930.8 6573.35,1930.8 ; 6568.8,2085.5 6573.35,2085.5 ; 6568.8,2090.05 6577.9,2090.05 ; 6568.8,2381.25 6577.9,2381.25 ; 6573.35,1653.25 6587,1653.25 ; 6573.35,1707.85 6582.45,1707.85 ; 6573.35,1712.4 6577.9,1712.4 ; 6573.35,1921.7 6582.45,1921.7 ; 6573.35,2094.6 6582.45,2094.6 ; 6573.35,2376.7 6678,2376.7 ; 6577.9,1698.75 6587,1698.75 ; 6577.9,1703.3 6582.45,1703.3 ; 6577.9,1912.6 6587,1912.6 ; 6577.9,1917.15 6582.45,1917.15 ; 6577.9,2099.15 6582.45,2099.15 ; 6577.9,2103.7 6587,2103.7 ; 6582.45,1657.8 6587,1657.8 ; 6582.45,1685.1 6591.55,1685.1 ; 6582.45,1689.65 6587,1689.65 ; 6582.45,1694.2 6587,1694.2 ; 6582.45,1903.5 6591.55,1903.5 ; 6582.45,1908.05 6587,1908.05 ; 6582.45,2108.25 6587,2108.25 ; 6582.45,2112.8 6591.55,2112.8 ; 6582.45,2372.15 6591.55,2372.15 ; 6587,1662.35 6591.55,1662.35 ; 6587,1666.9 6591.55,1666.9 ; 6587,1671.45 6591.55,1671.45 ; 6587,1676 6591.55,1676 ; 6587,1680.55 6591.55,1680.55 ; 6587,1898.95 6591.55,1898.95 ; 6587,2117.35 6591.55,2117.35 ; 6587,2121.9 6596.1,2121.9 ; 6587,2367.6 6596.1,2367.6 ; 6591.55,1889.85 6600.65,1889.85 ; 6591.55,1894.4 6596.1,1894.4 ; 6591.55,2126.45 6600.65,2126.45 ; 6591.55,2363.05 6600.65,2363.05 ; 6596.1,1880.75 6605.2,1880.75 ; 6596.1,1885.3 6600.65,1885.3 ; 6596.1,2131 6600.65,2131 ; 6596.1,2135.55 6605.2,2135.55 ; 6596.1,2358.5 6605.2,2358.5 ; 6600.65,1871.65 6609.75,1871.65 ; 6600.65,1876.2 6605.2,1876.2 ; 6600.65,2140.1 6605.2,2140.1 ; 6600.65,2144.65 6609.75,2144.65 ; 6600.65,2353.95 6609.75,2353.95 ; 6605.2,1862.55 6614.3,1862.55 ; 6605.2,1867.1 6609.75,1867.1 ; 6605.2,2149.2 6609.75,2149.2 ; 6605.2,2153.75 6614.3,2153.75 ; 6605.2,2349.4 6614.3,2349.4 ; 6609.75,1858 6618.85,1858 ; 6609.75,2158.3 6618.85,2158.3 ; 6609.75,2344.85 6618.85,2344.85 ; 6614.3,1848.9 6623.4,1848.9 ; 6614.3,1853.45 6618.85,1853.45 ; 6614.3,2162.85 6618.85,2162.85 ; 6614.3,2167.4 6623.4,2167.4 ; 6618.85,1839.8 6627.95,1839.8 ; 6618.85,1844.35 6623.4,1844.35 ; 6618.85,2171.95 6623.4,2171.95 ; 6618.85,2176.5 6627.95,2176.5 ; 6618.85,2335.75 6627.95,2335.75 ; 6618.85,2340.3 6623.4,2340.3 ; 6623.4,1835.25 6632.5,1835.25 ; 6623.4,2181.05 6632.5,2181.05 ; 6627.95,1826.15 6641.6,1826.15 ; 6627.95,1830.7 6632.5,1830.7 ; 6627.95,2185.6 6632.5,2185.6 ; 6627.95,2190.15 6637.05,2190.15 ; 6627.95,2326.65 6637.05,2326.65 ; 6627.95,2331.2 6632.5,2331.2 ; 6632.5,1817.05 6646.15,1817.05 ; 6632.5,1821.6 6646.15,1821.6 ; 6632.5,2194.7 6637.05,2194.7 ; 6632.5,2199.25 6641.6,2199.25 ; 6632.5,2322.1 6641.6,2322.1 ; 6637.05,1807.95 6646.15,1807.95 ; 6637.05,1812.5 6646.15,1812.5 ; 6637.05,1830.7 6641.6,1830.7 ; 6637.05,1835.25 6641.6,1835.25 ; 6637.05,1839.8 6641.6,1839.8 ; 6637.05,1844.35 6641.6,1844.35 ; 6637.05,1848.9 6641.6,1848.9 ; 6637.05,1853.45 6641.6,1853.45 ; 6637.05,1858 6641.6,1858 ; 6637.05,1862.55 6641.6,1862.55 ; 6637.05,1867.1 6641.6,1867.1 ; 6637.05,1871.65 6641.6,1871.65 ; 6637.05,1876.2 6641.6,1876.2 ; 6637.05,1880.75 6641.6,1880.75 ; 6637.05,1885.3 6641.6,1885.3 ; 6637.05,1889.85 6641.6,1889.85 ; 6637.05,1894.4 6641.6,1894.4 ; 6637.05,1898.95 6641.6,1898.95 ; 6637.05,1903.5 6641.6,1903.5 ; 6637.05,1908.05 6641.6,1908.05 ; 6637.05,1912.6 6641.6,1912.6 ; 6637.05,1917.15 6641.6,1917.15 ; 6637.05,1921.7 6646.15,1921.7 ; 6637.05,1926.25 6646.15,1926.25 ; 6637.05,2203.8 6641.6,2203.8 ; 6637.05,2317.55 6646.15,2317.55 ; 6641.6,1794.3 6650.7,1794.3 ; 6641.6,1798.85 6650.7,1798.85 ; 6641.6,1803.4 6646.15,1803.4 ; 6641.6,1930.8 6646.15,1930.8 ; 6641.6,1935.35 6646.15,1935.35 ; 6641.6,1939.9 6646.15,1939.9 ; 6641.6,1944.45 6646.15,1944.45 ; 6641.6,1949 6650.7,1949 ; 6641.6,2208.35 6646.15,2208.35 ; 6641.6,2212.9 6650.7,2212.9 ; 6641.6,2313 6650.7,2313 ; 6646.15,1776.1 6655.25,1776.1 ; 6646.15,1780.65 6650.7,1780.65 ; 6646.15,1785.2 6650.7,1785.2 ; 6646.15,1789.75 6650.7,1789.75 ; 6646.15,1953.55 6650.7,1953.55 ; 6646.15,1958.1 6650.7,1958.1 ; 6646.15,1962.65 6650.7,1962.65 ; 6646.15,1967.2 6655.25,1967.2 ; 6646.15,2217.45 6650.7,2217.45 ; 6646.15,2222 6655.25,2222 ; 6646.15,2308.45 6655.25,2308.45 ; 6650.7,1762.45 6659.8,1762.45 ; 6650.7,1767 6655.25,1767 ; 6650.7,1771.55 6655.25,1771.55 ; 6650.7,1971.75 6655.25,1971.75 ; 6650.7,1976.3 6655.25,1976.3 ; 6650.7,1980.85 6659.8,1980.85 ; 6650.7,1985.4 6659.8,1985.4 ; 6650.7,2226.55 6655.25,2226.55 ; 6650.7,2231.1 6659.8,2231.1 ; 6650.7,2303.9 6655.25,2303.9 ; 6655.25,1753.35 6664.35,1753.35 ; 6655.25,1757.9 6659.8,1757.9 ; 6655.25,1989.95 6659.8,1989.95 ; 6655.25,1994.5 6664.35,1994.5 ; 6655.25,2235.65 6659.8,2235.65 ; 6655.25,2294.8 6664.35,2294.8 ; 6655.25,2299.35 6659.8,2299.35 ; 6659.8,1739.7 6668.9,1739.7 ; 6659.8,1744.25 6664.35,1744.25 ; 6659.8,1748.8 6664.35,1748.8 ; 6659.8,1999.05 6664.35,1999.05 ; 6659.8,2003.6 6664.35,2003.6 ; 6659.8,2008.15 6668.9,2008.15 ; 6659.8,2240.2 6664.35,2240.2 ; 6659.8,2244.75 6668.9,2244.75 ; 6659.8,2290.25 6668.9,2290.25 ; 6664.35,1730.6 6673.45,1730.6 ; 6664.35,1735.15 6668.9,1735.15 ; 6664.35,2012.7 6668.9,2012.7 ; 6664.35,2017.25 6673.45,2017.25 ; 6664.35,2249.3 6668.9,2249.3 ; 6664.35,2253.85 6673.45,2253.85 ; 6664.35,2281.15 6673.45,2281.15 ; 6664.35,2285.7 6668.9,2285.7 ; 6668.9,1721.5 6678,1721.5 ; 6668.9,1726.05 6673.45,1726.05 ; 6668.9,2021.8 6673.45,2021.8 ; 6668.9,2026.35 6678,2026.35 ; 6668.9,2258.4 6687.1,2258.4 ; 6668.9,2262.95 6682.55,2262.95 ; 6668.9,2276.6 6678,2276.6 ; 6668.9,2372.15 6705.3,2372.15 ; 6673.45,1716.95 6678,1716.95 ; 6673.45,2030.9 6678,2030.9 ; 6673.45,2035.45 6682.55,2035.45 ; 6673.45,2267.5 6682.55,2267.5 ; 6673.45,2272.05 6678,2272.05 ; 6678,1707.85 6687.1,1707.85 ; 6678,1712.4 6682.55,1712.4 ; 6678,2040 6682.55,2040 ; 6678,2044.55 6687.1,2044.55 ; 6682.55,1698.75 6691.65,1698.75 ; 6682.55,1703.3 6687.1,1703.3 ; 6682.55,2049.1 6687.1,2049.1 ; 6682.55,2253.85 6687.1,2253.85 ; 6687.1,1694.2 6696.2,1694.2 ; 6687.1,2053.65 6691.65,2053.65 ; 6687.1,2058.2 6696.2,2058.2 ; 6687.1,2244.75 6696.2,2244.75 ; 6687.1,2249.3 6691.65,2249.3 ; 6691.65,1685.1 6700.75,1685.1 ; 6691.65,1689.65 6696.2,1689.65 ; 6691.65,2062.75 6696.2,2062.75 ; 6691.65,2235.65 6700.75,2235.65 ; 6691.65,2240.2 6696.2,2240.2 ; 6696.2,1680.55 6705.3,1680.55 ; 6696.2,2067.3 6700.75,2067.3 ; 6696.2,2071.85 6705.3,2071.85 ; 6696.2,2226.55 6705.3,2226.55 ; 6696.2,2231.1 6700.75,2231.1 ; 6700.75,1671.45 6709.85,1671.45 ; 6700.75,1676 6705.3,1676 ; 6700.75,2076.4 6705.3,2076.4 ; 6700.75,2222 6709.85,2222 ; 6700.75,2367.6 6723.5,2367.6 ; 6705.3,1666.9 6714.4,1666.9 ; 6705.3,2080.95 6709.85,2080.95 ; 6705.3,2085.5 6714.4,2085.5 ; 6705.3,2212.9 6714.4,2212.9 ; 6705.3,2217.45 6709.85,2217.45 ; 6709.85,1662.35 6718.95,1662.35 ; 6709.85,2090.05 6718.95,2090.05 ; 6709.85,2203.8 6718.95,2203.8 ; 6709.85,2208.35 6714.4,2208.35 ; 6714.4,1657.8 6723.5,1657.8 ; 6714.4,2094.6 6723.5,2094.6 ; 6714.4,2194.7 6723.5,2194.7 ; 6714.4,2199.25 6718.95,2199.25 ; 6718.95,1653.25 6728.05,1653.25 ; 6718.95,2099.15 6728.05,2099.15 ; 6718.95,2190.15 6728.05,2190.15 ; 6718.95,2363.05 6737.15,2363.05 ; 6723.5,1648.7 6732.6,1648.7 ; 6723.5,2103.7 6732.6,2103.7 ; 6723.5,2181.05 6732.6,2181.05 ; 6723.5,2185.6 6728.05,2185.6 ; 6728.05,1644.15 6737.15,1644.15 ; 6728.05,2108.25 6732.6,2108.25 ; 6728.05,2171.95 6737.15,2171.95 ; 6728.05,2176.5 6732.6,2176.5 ; 6732.6,1639.6 6741.7,1639.6 ; 6732.6,2112.8 6737.15,2112.8 ; 6732.6,2167.4 6737.15,2167.4 ; 6732.6,2358.5 6750.8,2358.5 ; 6737.15,1635.05 6746.25,1635.05 ; 6737.15,2117.35 6741.7,2117.35 ; 6737.15,2158.3 6746.25,2158.3 ; 6737.15,2162.85 6741.7,2162.85 ; 6741.7,1630.5 6750.8,1630.5 ; 6741.7,2121.9 6746.25,2121.9 ; 6741.7,2149.2 6750.8,2149.2 ; 6741.7,2153.75 6746.25,2153.75 ; 6746.25,1621.4 6759.9,1621.4 ; 6746.25,1625.95 6755.35,1625.95 ; 6746.25,2126.45 6750.8,2126.45 ; 6746.25,2140.1 6755.35,2140.1 ; 6746.25,2144.65 6750.8,2144.65 ; 6746.25,2353.95 6764.45,2353.95 ; 6750.8,1612.3 6778.1,1612.3 ; 6750.8,1616.85 6769,1616.85 ; 6750.8,2131 6759.9,2131 ; 6750.8,2135.55 6764.45,2135.55 ; 6755.35,1603.2 6764.45,1603.2 ; 6755.35,1607.75 6759.9,1607.75 ; 6759.9,1598.65 6769,1598.65 ; 6759.9,2140.1 6769,2140.1 ; 6759.9,2349.4 6773.55,2349.4 ; 6764.45,1589.55 6773.55,1589.55 ; 6764.45,1594.1 6769,1594.1 ; 6764.45,2144.65 6778.1,2144.65 ; 6769,1580.45 6778.1,1580.45 ; 6769,1585 6773.55,1585 ; 6769,1607.75 6782.65,1607.75 ; 6769,2344.85 6782.65,2344.85 ; 6773.55,1575.9 6778.1,1575.9 ; 6773.55,1603.2 6787.2,1603.2 ; 6773.55,2149.2 6782.65,2149.2 ; 6778.1,1566.8 6787.2,1566.8 ; 6778.1,1571.35 6782.65,1571.35 ; 6778.1,2153.75 6787.2,2153.75 ; 6778.1,2340.3 6791.75,2340.3 ; 6782.65,1557.7 6791.75,1557.7 ; 6782.65,1562.25 6787.2,1562.25 ; 6782.65,1598.65 6791.75,1598.65 ; 6787.2,1548.6 6796.3,1548.6 ; 6787.2,1553.15 6791.75,1553.15 ; 6787.2,1594.1 6800.85,1594.1 ; 6787.2,2158.3 6796.3,2158.3 ; 6787.2,2335.75 6800.85,2335.75 ; 6791.75,1539.5 6800.85,1539.5 ; 6791.75,1544.05 6796.3,1544.05 ; 6791.75,2162.85 6805.4,2162.85 ; 6796.3,1534.95 6805.4,1534.95 ; 6796.3,1589.55 6805.4,1589.55 ; 6796.3,2331.2 6809.95,2331.2 ; 6800.85,1521.3 6819.05,1521.3 ; 6800.85,1525.85 6809.95,1525.85 ; 6800.85,1530.4 6805.4,1530.4 ; 6800.85,1585 6814.5,1585 ; 6800.85,2167.4 6809.95,2167.4 ; 6805.4,2326.65 6819.05,2326.65 ; 6809.95,1507.65 6819.05,1507.65 ; 6809.95,1580.45 6823.6,1580.45 ; 6809.95,2171.95 6819.05,2171.95 ; 6814.5,1357.5 6823.6,1357.5 ; 6814.5,1503.1 6823.6,1503.1 ; 6814.5,1525.85 6819.05,1525.85 ; 6814.5,1530.4 6823.6,1530.4 ; 6814.5,2322.1 6828.15,2322.1 ; 6819.05,1362.05 6823.6,1362.05 ; 6819.05,1366.6 6828.15,1366.6 ; 6819.05,1489.45 6828.15,1489.45 ; 6819.05,1494 6823.6,1494 ; 6819.05,1498.55 6823.6,1498.55 ; 6819.05,1534.95 6823.6,1534.95 ; 6819.05,1539.5 6828.15,1539.5 ; 6819.05,1575.9 6832.7,1575.9 ; 6819.05,2176.5 6832.7,2176.5 ; 6823.6,1371.15 6828.15,1371.15 ; 6823.6,1375.7 6832.7,1375.7 ; 6823.6,1480.35 6832.7,1480.35 ; 6823.6,1484.9 6828.15,1484.9 ; 6823.6,1544.05 6832.7,1544.05 ; 6823.6,2317.55 6832.7,2317.55 ; 6828.15,1380.25 6837.25,1380.25 ; 6828.15,1384.8 6837.25,1384.8 ; 6828.15,1389.35 6841.8,1389.35 ; 6828.15,1466.7 6837.25,1466.7 ; 6828.15,1471.25 6832.7,1471.25 ; 6828.15,1475.8 6832.7,1475.8 ; 6828.15,1548.6 6832.7,1548.6 ; 6828.15,1553.15 6837.25,1553.15 ; 6828.15,1571.35 6846.35,1571.35 ; 6828.15,2181.05 6841.8,2181.05 ; 6828.15,2313 6841.8,2313 ; 6832.7,1393.9 6841.8,1393.9 ; 6832.7,1398.45 6842.7,1398.45 ; 6832.7,1403 6846.35,1403 ; 6832.7,1448.5 6841.8,1448.5 ; 6832.7,1453.05 6837.25,1453.05 ; 6832.7,1457.6 6837.25,1457.6 ; 6832.7,1462.15 6837.25,1462.15 ; 6832.7,1557.7 6837.25,1557.7 ; 6832.7,1562.25 6841.8,1562.25 ; 6837.25,1407.55 6850.9,1407.55 ; 6837.25,1412.1 6841.8,1412.1 ; 6837.25,1416.65 6841.8,1416.65 ; 6837.25,1421.2 6841.8,1421.2 ; 6837.25,1425.75 6841.8,1425.75 ; 6837.25,1430.3 6841.8,1430.3 ; 6837.25,1434.85 6841.8,1434.85 ; 6837.25,1439.4 6841.8,1439.4 ; 6837.25,1443.95 6841.8,1443.95 ; 6837.25,1566.8 6855.45,1566.8 ; 6837.25,2185.6 6850.9,2185.6 ; 6837.25,2308.45 6846.35,2308.45 ; 6841.8,2303.9 6855.45,2303.9 ; 6846.35,1412.1 6855.45,1412.1 ; 6846.35,2190.15 6864.55,2190.15 ; 6850.9,1416.65 6855.45,1416.65 ; 6850.9,1421.2 6860,1421.2 ; 6850.9,1562.25 6869.1,1562.25 ; 6850.9,2299.35 6860,2299.35 ; 6855.45,1425.75 6860,1425.75 ; 6855.45,1430.3 6864.55,1430.3 ; 6855.45,2294.8 6864.55,2294.8 ; 6860,1434.85 6869.1,1434.85 ; 6860,2194.7 6878.2,2194.7 ; 6860,2290.25 6873.65,2290.25 ; 6864.55,1439.4 6869.1,1439.4 ; 6864.55,1443.95 6873.65,1443.95 ; 6864.55,1557.7 6887.3,1557.7 ; 6869.1,1448.5 6873.65,1448.5 ; 6869.1,1453.05 6878.2,1453.05 ; 6869.1,2285.7 6878.2,2285.7 ; 6873.65,1457.6 6882.75,1457.6 ; 6873.65,2199.25 6900.95,2199.25 ; 6873.65,2281.15 6882.75,2281.15 ; 6878.2,1462.15 6882.75,1462.15 ; 6878.2,1466.7 6887.3,1466.7 ; 6878.2,2276.6 6887.3,2276.6 ; 6882.75,1471.25 6887.3,1471.25 ; 6882.75,1553.15 6910.05,1553.15 ; 6882.75,2272.05 6891.85,2272.05 ; 6887.3,1475.8 6891.85,1475.8 ; 6887.3,1480.35 6896.4,1480.35 ; 6887.3,2267.5 6896.4,2267.5 ; 6891.85,1484.9 6896.4,1484.9 ; 6891.85,1489.45 6900.95,1489.45 ; 6891.85,2203.8 6928.25,2203.8 ; 6896.4,1494 6900.95,1494 ; 6896.4,1498.55 6905.5,1498.55 ; 6896.4,2262.95 6900.95,2262.95 ; 6900.95,1503.1 6910.05,1503.1 ; 6900.95,1548.6 6941.9,1548.6 ; 6900.95,2258.4 6905.5,2258.4 ; 6905.5,1507.65 6910.05,1507.65 ; 6905.5,1512.2 6914.6,1512.2 ; 6905.5,2249.3 6914.6,2249.3 ; 6905.5,2253.85 6910.05,2253.85 ; 6910.05,1516.75 6914.6,1516.75 ; 6910.05,1521.3 6919.15,1521.3 ; 6910.05,2244.75 6919.15,2244.75 ; 6914.6,1525.85 6923.7,1525.85 ; 6914.6,2240.2 6923.7,2240.2 ; 6919.15,1530.4 6923.7,1530.4 ; 6919.15,1534.95 6928.25,1534.95 ; 6919.15,2235.65 6928.25,2235.65 ; 6923.7,1539.5 6928.25,1539.5 ; 6923.7,1544.05 7014.7,1544.05 ; 6923.7,2231.1 6932.8,2231.1 ; 6928.25,2222 6937.35,2222 ; 6928.25,2226.55 6932.8,2226.55 ; 6932.8,2217.45 6941.9,2217.45 ; 6937.35,2212.9 6946.45,2212.9 ; 6996.5,1548.6 7037.45,1548.6 ; 7010.15,2203.8 7051.1,2203.8 ; 7032.9,1553.15 7060.2,1553.15 ; 7042,2199.25 7069.3,2199.25 ; 7051.1,1557.7 7073.85,1557.7 ; 7060.2,2194.7 7082.95,2194.7 ; 7069.3,1562.25 7087.5,1562.25 ; 7078.4,2190.15 7096.6,2190.15 ; 7082.95,1566.8 7101.15,1566.8 ; 7087.5,2185.6 7105.7,2185.6 ; 7096.6,1571.35 7110.25,1571.35 ; 7101.15,2181.05 7114.8,2181.05 ; 7110.25,1575.9 7123.9,1575.9 ; 7110.25,2176.5 7123.9,2176.5 ; 7119.35,1580.45 7133,1580.45 ; 7119.35,2171.95 7133,2171.95 ; 7128.45,1585 7137.55,1585 ; 7128.45,2167.4 7142.1,2167.4 ; 7133,1589.55 7146.65,1589.55 ; 7137.55,2162.85 7151.2,2162.85 ; 7142.1,1594.1 7155.75,1594.1 ; 7146.65,2158.3 7155.75,2158.3 ; 7151.2,1598.65 7160.3,1598.65 ; 7155.75,1603.2 7169.4,1603.2 ; 7155.75,2153.75 7164.85,2153.75 ; 7160.3,2149.2 7169.4,2149.2 ; 7164.85,1607.75 7173.95,1607.75 ; 7164.85,2144.65 7178.5,2144.65 ; 7169.4,1612.3 7183.05,1612.3 ; 7173.95,2140.1 7183.05,2140.1 ; 7178.5,1616.85 7187.6,1616.85 ; 7178.5,2135.55 7187.6,2135.55 ; 7183.05,1621.4 7192.15,1621.4 ; 7183.05,2131 7192.15,2131 ; 7187.6,1625.95 7196.7,1625.95 ; 7187.6,2126.45 7196.7,2126.45 ; 7192.15,1630.5 7201.25,1630.5 ; 7192.15,2121.9 7201.25,2121.9 ; 7196.7,1635.05 7205.8,1635.05 ; 7196.7,2117.35 7205.8,2117.35 ; 7201.25,1639.6 7210.35,1639.6 ; 7201.25,2112.8 7210.35,2112.8 ; 7205.8,1644.15 7214.9,1644.15 ; 7205.8,2108.25 7214.9,2108.25 ; 7210.35,1648.7 7219.45,1648.7 ; 7210.35,2103.7 7219.45,2103.7 ; 7214.9,1653.25 7224,1653.25 ; 7214.9,2099.15 7224,2099.15 ; 7219.45,1657.8 7228.55,1657.8 ; 7219.45,2094.6 7228.55,2094.6 ; 7224,1662.35 7233.1,1662.35 ; 7224,2090.05 7228.55,2090.05 ; 7228.55,1666.9 7233.1,1666.9 ; 7228.55,2080.95 7237.65,2080.95 ; 7228.55,2085.5 7233.1,2085.5 ; 7233.1,1671.45 7237.65,1671.45 ; 7233.1,1676 7242.2,1676 ; 7233.1,2076.4 7242.2,2076.4 ; 7237.65,1680.55 7246.75,1680.55 ; 7237.65,2067.3 7246.75,2067.3 ; 7237.65,2071.85 7242.2,2071.85 ; 7242.2,1685.1 7246.75,1685.1 ; 7242.2,1689.65 7251.3,1689.65 ; 7242.2,2062.75 7251.3,2062.75 ; 7246.75,1694.2 7255.85,1694.2 ; 7246.75,2053.65 7255.85,2053.65 ; 7246.75,2058.2 7251.3,2058.2 ; 7251.3,1698.75 7255.85,1698.75 ; 7251.3,1703.3 7260.4,1703.3 ; 7251.3,2044.55 7260.4,2044.55 ; 7251.3,2049.1 7255.85,2049.1 ; 7255.85,1707.85 7260.4,1707.85 ; 7255.85,1712.4 7264.95,1712.4 ; 7255.85,2040 7260.4,2040 ; 7260.4,1716.95 7264.95,1716.95 ; 7260.4,1721.5 7269.5,1721.5 ; 7260.4,2026.35 7269.5,2026.35 ; 7260.4,2030.9 7264.95,2030.9 ; 7260.4,2035.45 7264.95,2035.45 ; 7264.95,1726.05 7269.5,1726.05 ; 7264.95,1730.6 7274.05,1730.6 ; 7264.95,2017.25 7274.05,2017.25 ; 7264.95,2021.8 7269.5,2021.8 ; 7269.5,1735.15 7274.05,1735.15 ; 7269.5,1739.7 7278.6,1739.7 ; 7269.5,2008.15 7278.6,2008.15 ; 7269.5,2012.7 7274.05,2012.7 ; 7274.05,1744.25 7278.6,1744.25 ; 7274.05,1748.8 7283.15,1748.8 ; 7274.05,1999.05 7283.15,1999.05 ; 7274.05,2003.6 7278.6,2003.6 ; 7278.6,1753.35 7283.15,1753.35 ; 7278.6,1757.9 7283.15,1757.9 ; 7278.6,1762.45 7287.7,1762.45 ; 7278.6,1980.85 7287.7,1980.85 ; 7278.6,1985.4 7287.7,1985.4 ; 7278.6,1989.95 7283.15,1989.95 ; 7278.6,1994.5 7283.15,1994.5 ; 7283.15,1767 7287.7,1767 ; 7283.15,1771.55 7287.7,1771.55 ; 7283.15,1776.1 7292.25,1776.1 ; 7283.15,1967.2 7292.25,1967.2 ; 7283.15,1971.75 7292.25,1971.75 ; 7283.15,1976.3 7287.7,1976.3 ; 7287.7,1780.65 7292.25,1780.65 ; 7287.7,1785.2 7292.25,1785.2 ; 7287.7,1789.75 7292.25,1789.75 ; 7287.7,1794.3 7296.8,1794.3 ; 7287.7,1949 7296.8,1949 ; 7287.7,1953.55 7296.8,1953.55 ; 7287.7,1958.1 7292.25,1958.1 ; 7287.7,1962.65 7292.25,1962.65 ; 7292.25,1798.85 7296.8,1798.85 ; 7292.25,1803.4 7296.8,1803.4 ; 7292.25,1807.95 7296.8,1807.95 ; 7292.25,1812.5 7296.8,1812.5 ; 7292.25,1817.05 7301.35,1817.05 ; 7292.25,1821.6 7301.35,1821.6 ; 7292.25,1926.25 7301.35,1926.25 ; 7292.25,1930.8 7296.8,1930.8 ; 7292.25,1935.35 7296.8,1935.35 ; 7292.25,1939.9 7296.8,1939.9 ; 7292.25,1944.45 7296.8,1944.45 ; 7296.8,1826.15 7301.35,1826.15 ; 7296.8,1830.7 7301.35,1830.7 ; 7296.8,1835.25 7301.35,1835.25 ; 7296.8,1839.8 7301.35,1839.8 ; 7296.8,1844.35 7301.35,1844.35 ; 7296.8,1848.9 7301.35,1848.9 ; 7296.8,1853.45 7301.35,1853.45 ; 7296.8,1858 7301.35,1858 ; 7296.8,1862.55 7301.35,1862.55 ; 7296.8,1867.1 7301.35,1867.1 ; 7296.8,1871.65 7301.35,1871.65 ; 7296.8,1876.2 7301.35,1876.2 ; 7296.8,1880.75 7301.35,1880.75 ; 7296.8,1885.3 7301.35,1885.3 ; 7296.8,1889.85 7301.35,1889.85 ; 7296.8,1894.4 7301.35,1894.4 ; 7296.8,1898.95 7301.35,1898.95 ; 7296.8,1903.5 7301.35,1903.5 ; 7296.8,1908.05 7301.35,1908.05 ; 7296.8,1912.6 7301.35,1912.6 ; 7296.8,1917.15 7301.35,1917.15 ; 7296.8,1921.7 7301.35,1921.7 ; 6809.95,1352.95 6819.05,1352.95 6809.95,1352.95
  Bottom Layer w8: 6914.6,2208.35 7028.35,2208.35
  Bottom Layer w10: 5677,2071.85 5778.5,2071.85 ; 5705,2121.9 5804.4,2121.9 ; 5713.4,1850 5764,1849 5725,1939.9 5750,1968 5922.7,1962.65 6000.05,1825 ; 5731.6,2167.4 5824.44,2167.4 ; 5758.9,2215 5850,2215 ; 5777.1,1922.45 5900,1922.45 5950,1821.6 ; 5831.7,1560 5777.1,1650 5810,1682.36 6077.4,1685 ; v1@5860,1625 v1(5850,1625) 5945,1625 5972.75,1648.7 6104.7,1648.7 ; 5868.1,1580.45 5955,1580 5995,1612.3 v1(6122.9,1612.3) ; 5971.52,2260.7 6068.3,2430 6364.05,2430 ; 6013.7,1576.59 6145.65,1575.9 ; 6015.16,2256 6104,2256 6240,2257 6276,2298 ; v1(6086.5,2365) 6109.25,2365 6205,2365 6236.65,2399.45 6350.4,2399.45 ; v1(6122.9,2330) 6220,2330 6255,2367.6 6345,2367.6 ; v1(6155,2297) 6234,2297 6266,2334 6318.55,2334 ; 6272.55,1455.58 v1(6258.98,1456) 6291.25,1455 6312,1478 6751,1477 ; 6293,2229 6405.5,2434 ; v1@6306,1396 6332.2,1395 6355.9,1416.65 6370,1417 6801,1416 ; 6306,1423 v1(6280.7,1423) 6312,1423 6333,1447 6360.7,1447 6780,1446 ; v1(6313,1394.1) v1@6317.42,1395.56
  Bottom Layer w20: 1721,2093 2387,2094 ; 1755,2158 2425,2157 ; 1756,2031 2418,2031 2503,2179 ; 1781,1978 2443,1978 2528,2126 ; 1793,2213 2467,2214 ; 1809,1924 2471,1924 2556,2072 ; 1810,1806 2003,1806 2188.99,1446.89 ; 1837,1759 1988,1759 ; 1838,1869.5 2500,1869.5 2585,2017.5 ; 1839,2274 2512.5,2274 2720.57,1872.26 ; 1864,1706.83 2015,1706.83 ; 1890,1653.67 2041,1653.67 ; 1915,1602.5 2066,1602.5 ; 1944,1550.33 2095,1550.33 ; 1971,1498.17 2122,1498.17 ; 1996,1446 2147,1446 ; 4368,1733 5033.29,1730.97 5388.15,2354.21 ; 4379,1768 4437,1868 ; 4403,1652 5078,1652 5477,2358 ; 4433,1573 5112,1571 5554.15,2359 ; 4445.67,1768 4503.67,1868 ; 4468,1494 5144.18,1494 5627,2358.5 ; 4512.33,1768 4570.33,1868 ; 4579,1768 4637,1868 ; 4645.67,1768 4703.67,1868 ; 4712.33,1768 4770.33,1868 ; 4779,1768 4837,1868 ; 4806,2344 5282,2346 ; 4845.67,1768 4952,1945.5 ; 4875,2277 5242,2271 ; 4912.33,1768 5014,1944.45 ; 4933,2205 5210,2202 ; 4979,1768 5082,1948 ; 4990,2137.65 5171,2139 ; 5032,2079 5131,2076 ; 5066.35,2019 5096,2017.5 ; 5228.77,1492.67 5460,1919 5702.21,1496.69 ; 5298.3,1493.59 5464,1800.6 5622.02,1496.5 ; 5368,1493.17 5460,1675 5547.08,1497.53
  other v2: 1744.9,2396.95

## Polygon pours and split planes (outlines as drawn)
NetD1_1 on Bottom Layer "NONET_L01_P-001" (solid, pour order 2): 7171,1301 7159.29,1312.71 ccw(c7088.58,1242) 7088.58,1342 2104.42,1342 ccw(c2104.42,1242) 2033.71,1312.71 2022,1301
NetC1_0 on Top Layer "NONET_L01_P-001" (solid, pour order 4): 1745,2447 ccw(c1745,2397) 1695,2397 1695,1390.4 ccw(c1764,1390.4) 1764,1321.4 7484.4,1321.4 ccw(c7484.4,1374) 7537,1374 7537,2349 ccw(c7437,2349) 7437,2449 1807,2449

## Other copper
Top Layer:
  pour cut-out: 6921.91,1548.65 6853,1299 7162.64,1299 7078.95,1570.51
Bottom Layer:
  region: 5015,2002 4939,2109 4864,2002
  region: 2153,1819.5 2049,1820 2095,1732
  region: 2615,1986 2677,1865 2548,1865
  region: 2615,1977
  pour cut-out: 6483.9,2330 6526,2256 6474.3,2217 6426.3,2238 6434,2265
  region: 6639,2272 6612,2302 6576,2342 6544,2367 6506,2396 6470,2413.1 6455.1,2419 6360.7,2247 6338.3,2208.35 6378,2189 6397.5,2180 6418,2166 6443,2145 6468,2121.9 6496,2091 6518.25,2065.75
  region: 5991.89,2057.63 5942.11,2148.37 6004.11,2148.37 6053.89,2057.63
  region: 6258.98,2057.68 6209.2,2148.42 6271.2,2148.42 6320.98,2057.68
  region: 6430,1979
  region: 5727.12,2137.65 5708.92,2106.9 5663.27,2106.9 5683.23,2137.65
  region: 5699.12,2087.6 5680.92,2056.85 5635.27,2056.85 5655.23,2087.6
  region: 5753.72,2183.15 5735.52,2152.4 5689.88,2152.4 5709.82,2183.15
  region: 5781.02,2230.75 5762.82,2200 5717.18,2200 5737.12,2230.75
  region: 5880,1898.95 5915,1820 5813.5,1820 5781.65,1898.95

## Silkscreen, mask and mechanical layers (free items; w line width, h text height)
Top Overlay:
  drawing of 399 lines, arcs and shapes, not listed
Bottom Overlay:
  lines w10: 5919.85,2163 5983.77,2046 6344.28,2046 6279.77,2163 6234,2163 5919.85,2163
Top Solder:
  drawing of 9069 lines, arcs and shapes, not listed
Bottom Solder:
  drawing of 5578 lines, arcs and shapes, not listed
Mechanical 1:
  circle w6: c6970,1875 r323
  lines w6: 1665,1374.26 1665,2396.95 cw(c1744.9,2396.95) 1744.9,2476.85 7484,2477 ; 1665,1375 ccw(c1744.25,1375) 1744.25,1295.75 7483,1295.75 ; 7482.48,1295.75 ccw(c7482.48,1375) 7561.73,1375 7561.73,2400 ; 7483.45,2476.85 cw(c7483.45,2398.56) 7561.73,2398.56